# Altium PCB WIoT_WM01_V100.PcbDoc
Units mm, origin at the board's own origin, x right, y up, seen from the top; angles counter-clockwise.
Board outline 36 x 50 mm, 4 copper layers (Top Layer, Internal Plane 1, Internal Plane 2, Bottom Layer); 38 components, 47 nets, 212 pads, 102 vias.
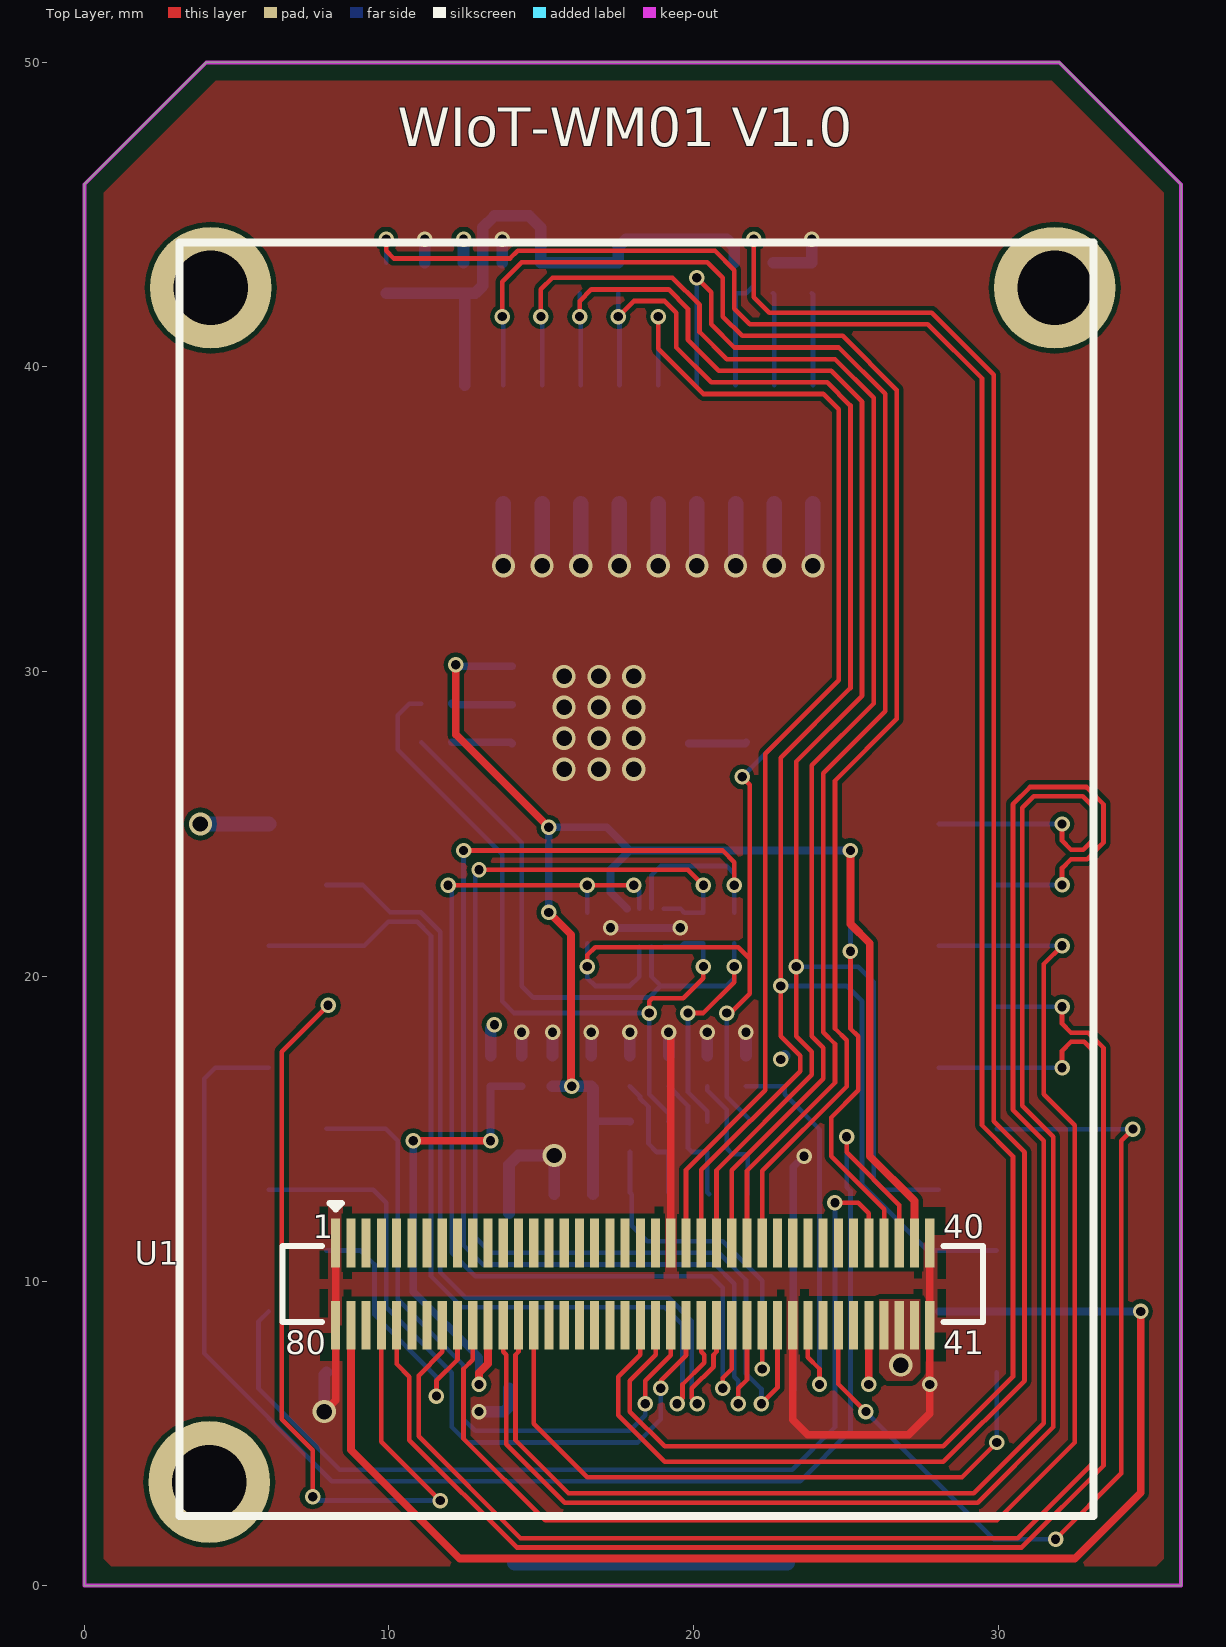
[diagram p0: Top Layer view]
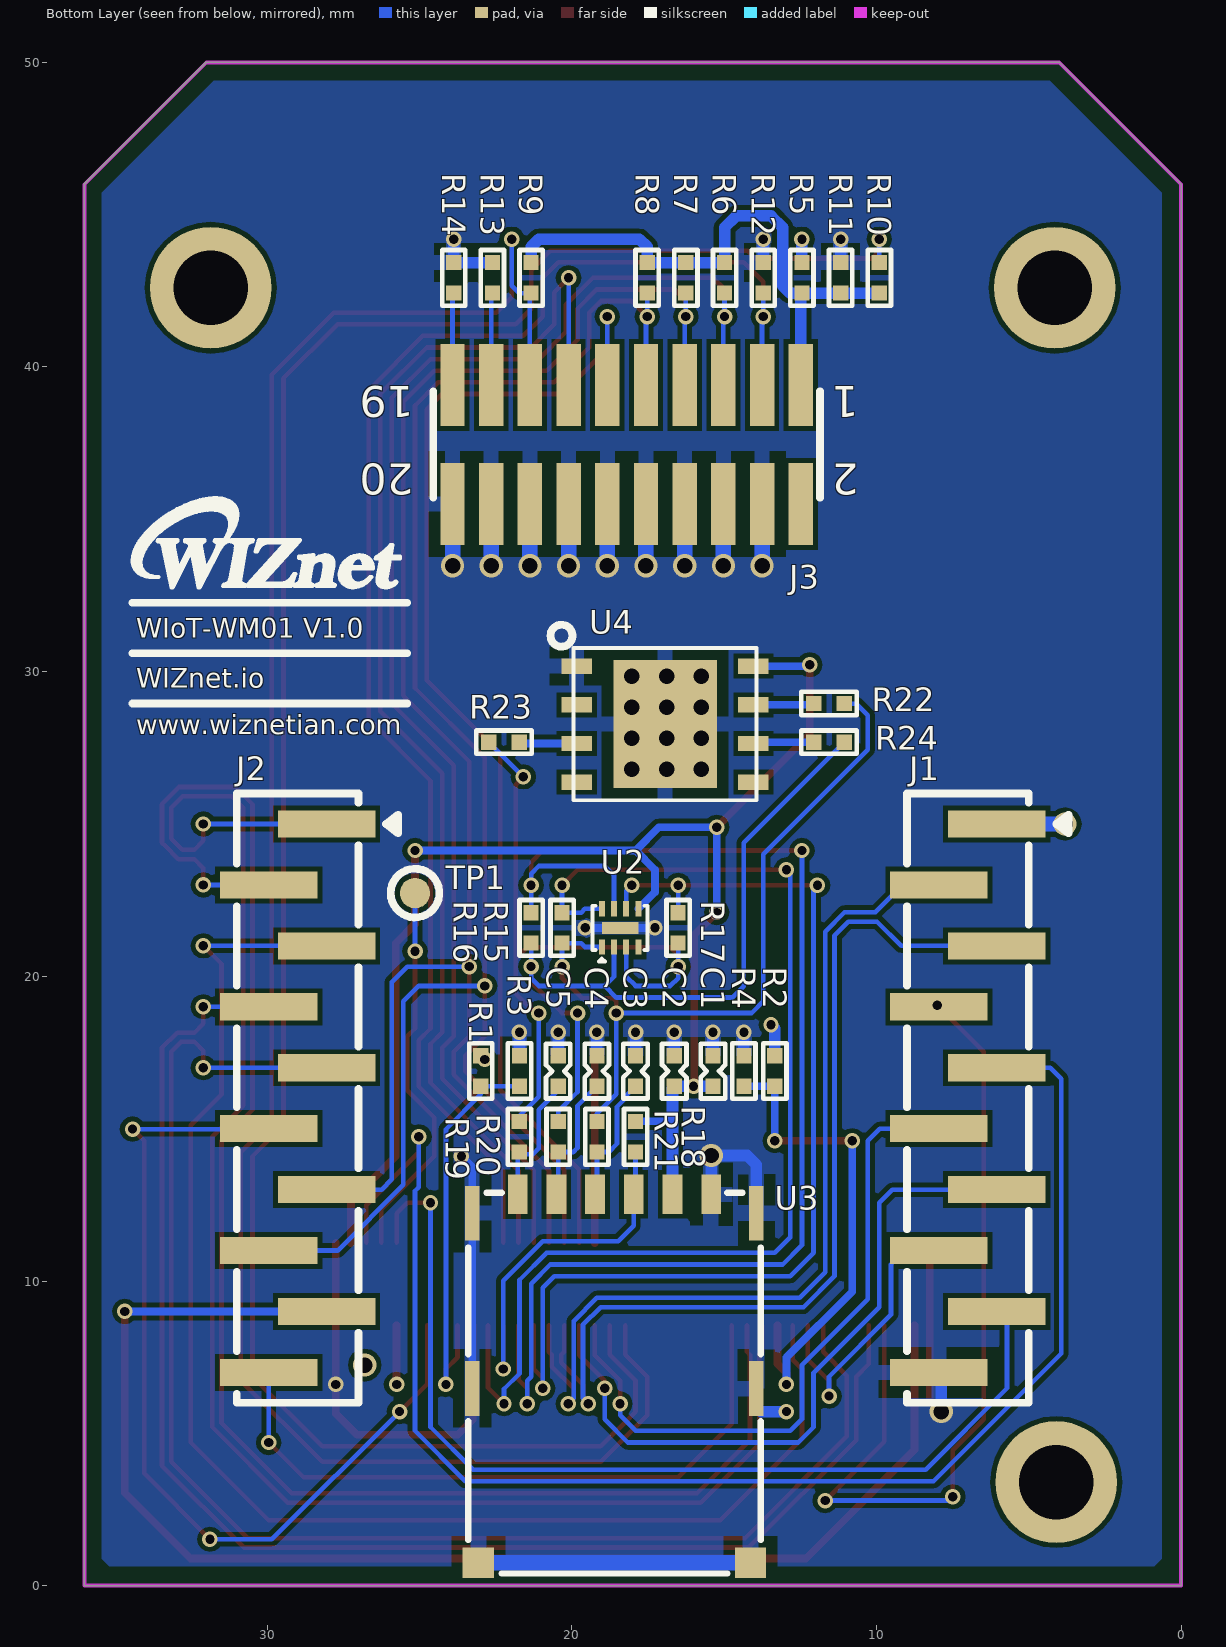
[diagram p1: Bottom Layer view, seen from below]
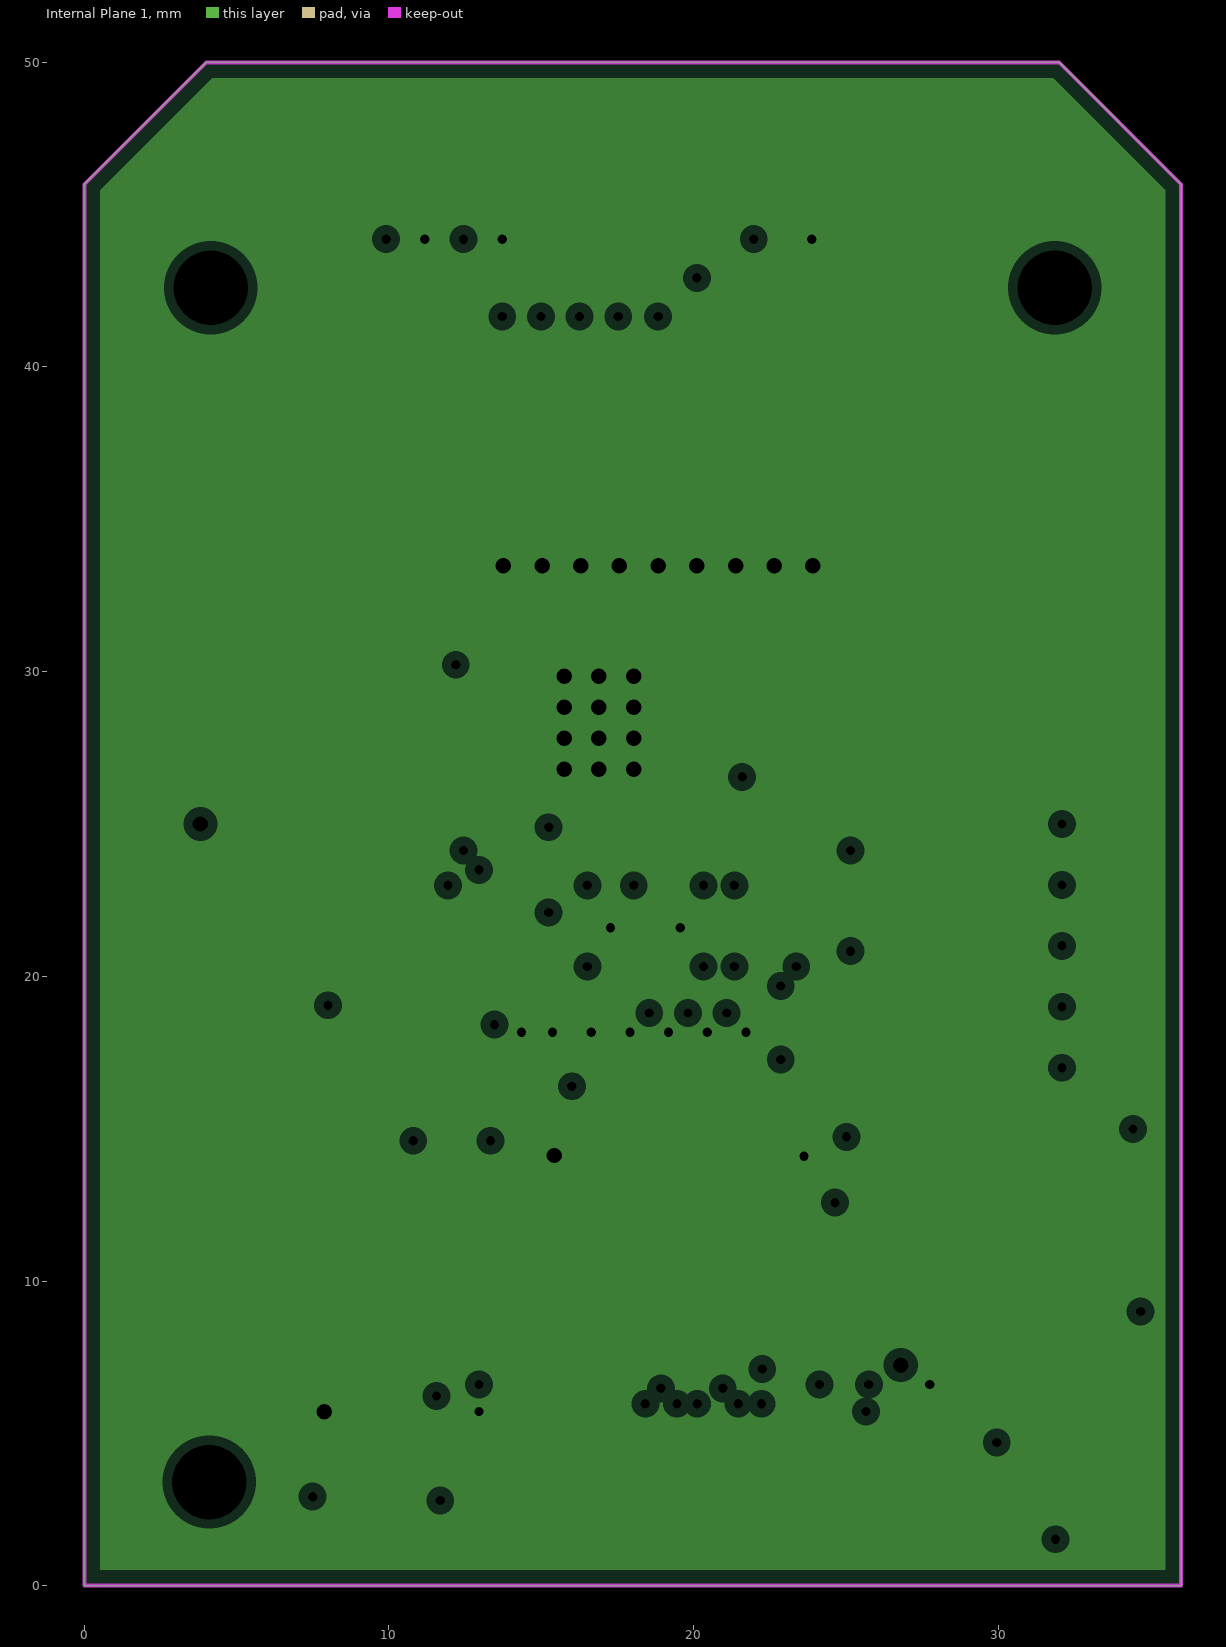
[diagram p2: Internal Plane 1, clearances drawn from the general rule]
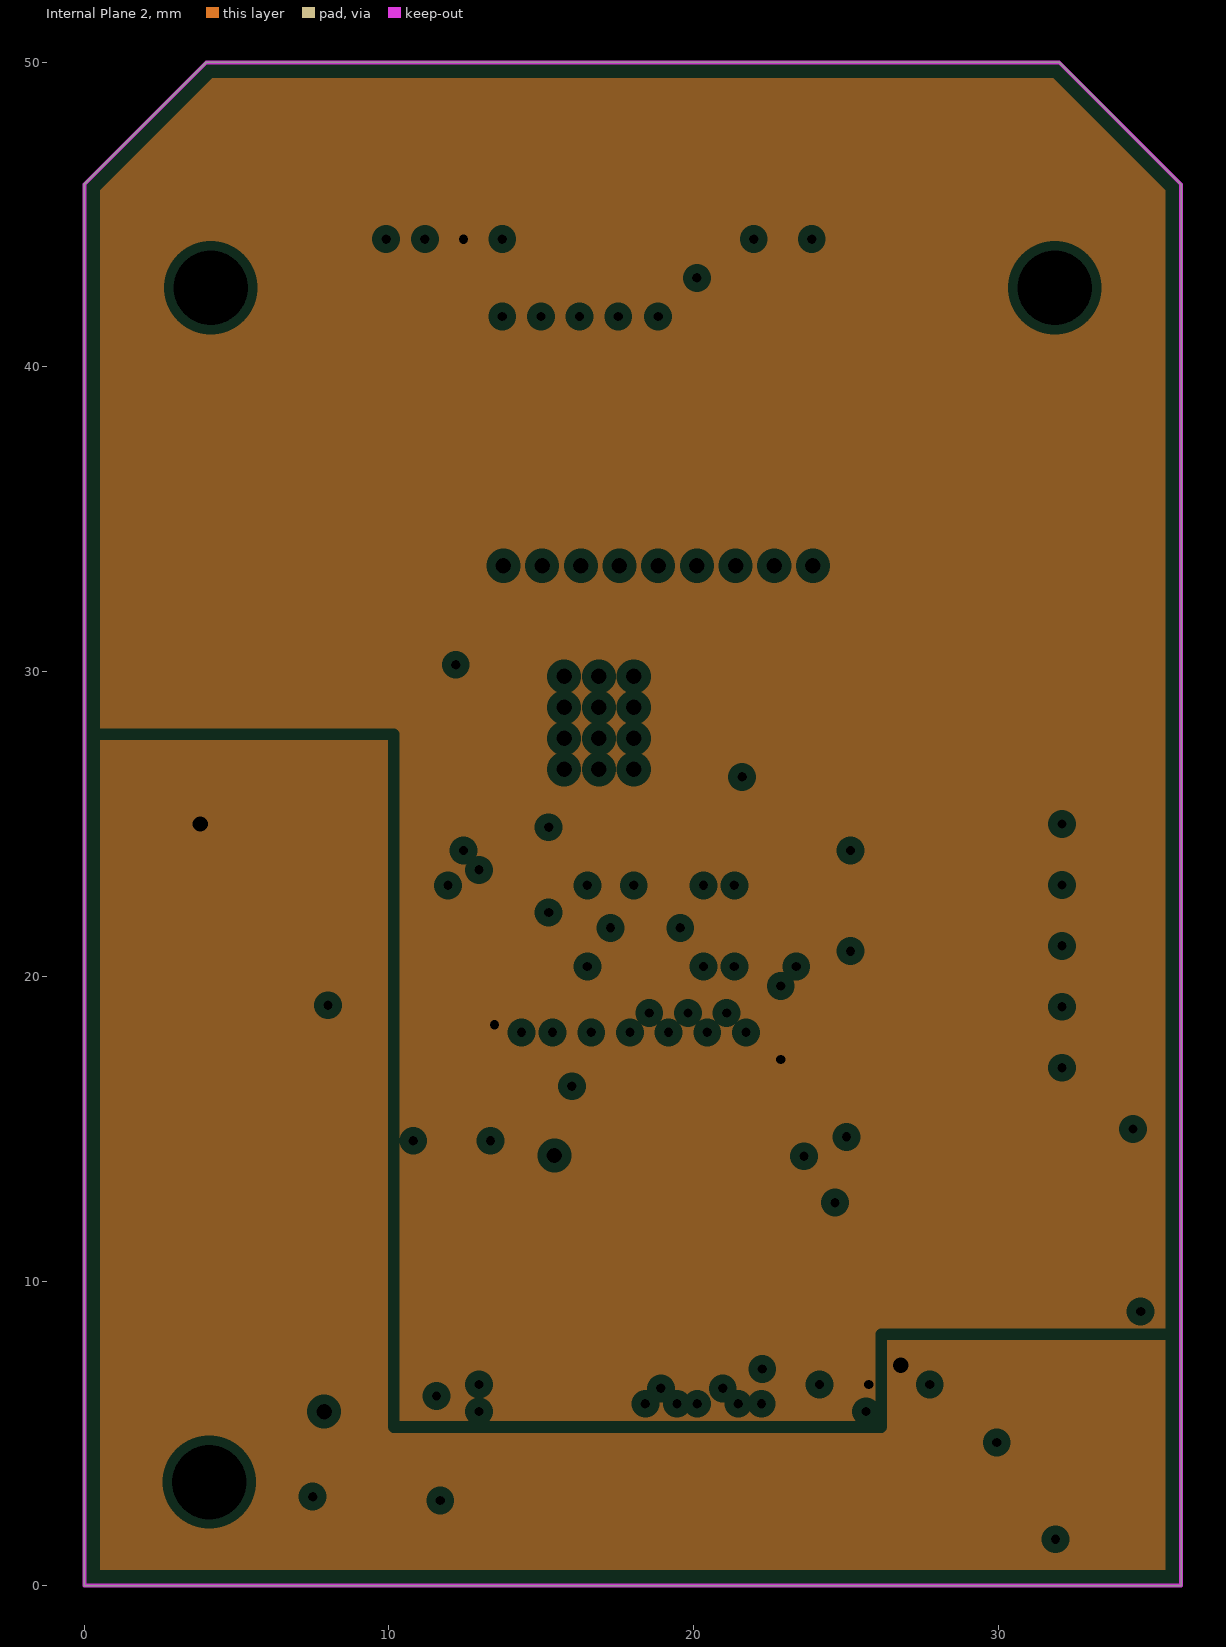
[diagram p3: Internal Plane 2, clearances drawn from the general rule]

## Layer stack, top to bottom
Top Solder: solder mask 0.0102, Solder Resist, Dk 3.5
Top Layer: signal copper 0.0356
Dielectric1: core 0.32, FR-4, Dk 4.8
Internal Plane 1: plane copper 0.0356, net GND
Dielectric5: prepreg 0.32, FR-4, Dk 4.8
Internal Plane 2: plane copper 0.0356, net (Multiple Nets)
Dielectric6: core 0.32, FR-4, Dk 4.8
Bottom Layer: signal copper 0.0356
Bottom Solder: solder mask 0.0102, Solder Resist, Dk 3.5

## Board outline
0,0 0,46 4,50 32,50 36,46 36,0

## Design rules (kind name [scope] priority, off if disabled: settings)
Clearance [All] p1: gap=0.152
DiffPairsRouting [All] p1: maxlimit=0.152 minlimit=0.152 mostfreqgap=0.152 toplayer_minwidth=0.152 toplayer_maxwidth=0.152 toplayer_prefwidth=0.152 bottomlayer_minwidth=0.152 bottomlayer_maxwidth=0.152 bottomlayer_prefwidth=0.152 maxuncoupledlength=15.24
HoleSize [All] p1: absolutevalues=TRUE maxlimit=25.4 minlimit=0.025 maxpercent=80.000 minpercent=20.000
PlaneClearance [All] p1: clearance=0.305
PlaneConnect [All] p1: planeconnectstyle=Direct reliefexpansion=0.508 reliefentries=4 reliefconductorwidth=0.254 reliefairgap=0.254
PolygonConnect PolygonConnect_2 [IsPad vs IsNamedPolygon('Top Layer-GND') Or  IsNamedPolygon('Bottom Layer-GND')] p1: connectstyle=Relief reliefconductorwidth=0.508 reliefentries=4 polygonreliefangle="90 Angle" airgapwidth=0.381
PolygonConnect PolygonConnect_1 [IsVia] p2: connectstyle=Direct reliefconductorwidth=0.254 reliefentries=4 polygonreliefangle="90 Angle" airgapwidth=0.254
PolygonConnect [All] p3: connectstyle=Direct reliefconductorwidth=0.254 reliefentries=4 polygonreliefangle="90 Angle" airgapwidth=0.254
RoutingVias [All] p1: holewidth=0.305 width=0.508 viastyle="Through Hole" minholewidth=0.305 minwidth=0.508 maxholewidth=0.508 maxwidth=0.762
SolderMaskExpansion [All] p1: expansion=0
Width [All] p1: maxlimit=2.54 minlimit=0.102 preferedwidth=0.152
26 further rules are at their usual default settings.

## Components (designator, comment, footprint, x,y, rotation, side; value= is the part's Value field where it differs from the comment)
C1 "1uF" CAP-0402 15.367,16.891 r270 bottom
C2 "33pF" CAP-0402 16.637,16.891 r270 bottom
C3 "33pF" CAP-0402 17.907,16.891 r270 bottom
C4 "33pF" CAP-0402 19.177,16.891 r270 bottom
C5 "33pF" CAP-0402 20.447,16.891 r270 bottom
J1 "2.00mm 1x10 Pin Header SMD" IDC(SMD)-1X10(2MM) 7,16 r180 bottom locked
J2 "2.00mm 1x10 Pin Header SMD" IDC(SMD)-1X10(2MM) 29,16 r180 bottom locked
J3 "1.27mm 2x10 Pin Header SMD" IDC(SMD)-2X10(1.27MM) 18.2,37.456 r0 bottom locked
R1 "DNI" RES-0402#1 22.987,16.891 r90 bottom
R2 "DNI" RES-0402#1 13.335,16.891 r90 bottom
R3 "DNI" RES-0402#1 21.717,16.891 r270 bottom
R4 "DNI" RES-0402#1 14.351,16.891 r270 bottom
R5 "DNI" RES-0402#1 12.446,42.926 r270 bottom
R6 "10K" RES-0402#1 14.986,42.926 r90 bottom
R7 "10K" RES-0402#1 16.256,42.926 r90 bottom
R8 "10K" RES-0402#1 17.526,42.926 r90 bottom
R9 "10K" RES-0402#1 21.336,42.926 r90 bottom
R10 "10K" RES-0402#1 9.906,42.926 r90 bottom
R11 "DNI" RES-0402#1 11.176,42.926 r270 bottom
R12 "47K" RES-0402#1 13.716,42.926 r270 bottom
R13 "10K" RES-0402#1 22.606,42.926 r270 bottom
R14 "10K" RES-0402#1 23.876,42.926 r270 bottom
R15 "DNI" RES-0402#1 20.32,21.59 r270 bottom
R16 "DNI" RES-0402#1 21.336,21.59 r270 bottom
R17 "DNI" RES-0402#1 16.51,21.59 r270 bottom
R18 "DNI" RES-0402#2 17.907,14.732 r270 bottom
R19 "0R" RES-0402#2 21.717,14.732 r270 bottom
R20 "0R" RES-0402#2 20.447,14.732 r90 bottom
R21 "0R" RES-0402#2 19.177,14.732 r90 bottom
R22 "0R" RES-0402#2 11.557,28.956 r180 bottom
R23 "0R" RES-0402#2 22.225,27.686 r180 bottom
R24 "0R" RES-0402#2 11.557,27.686 r180 bottom
TP1 "TESTPOINT_SMD" TP(SMD)-1PI 25.146,22.733 r180 bottom
U1 "AXK6F80347YG" WM-N400MSE 18,9.9 r0 top locked
U2 "TPD3F303DQDR" PWSON08(0.4/1.45X1.8) 18.415,21.59 r90 bottom
U3 "Nano_SIM" 693-043-020-611 18.6,12.895 r180 bottom locked
U4 "e-SIM" e-SIM 19.939,25.781 r180 bottom
? "Comment" LOGO-WIZNET(SMALL) 33.147,32.766 r180 bottom

## Footprints (in the part's own frame and the unit in brackets; to place one, negate y for a bottom-side part, rotate by r counter-clockwise, add the part's x,y. Pads: shape width x height; smd on the part's side, far side on the other; paste and mask are expansions set on the pad)
693-043-020-611 [mm]
  rect 0.65x1.3 smd: 1(1.905,-0.05) 2(-0.635,-0.05) 3(-1.905,-0.05) 5(3.175,-0.05) 6(0.635,-0.05) 7(-3.175,-0.05)
  rect 0.48x1.8 smd: 8(-4.67,-0.67) 9(4.66,-0.67) 10(4.66,-6.42) 11(-4.67,-6.42)
  rect 1.03x1 smd: 12(4.465,-12.14) 13(-4.465,-12.14)
  silkscreen extent -4.8,-12.5 4.8,0, body extent -4.75,-12.5 4.75,0, height 1.2
CAP-0402 [mm]
  rect 0.5x0.5 smd: 1(-0.5,0) 2(0.5,0)
  silkscreen extent -0.9,-0.4 0.9,0.4, body extent -0.48,-0.25 0.52,0.25, height 0.6
e-SIM [mm]
  rect 1x0.5 smd: 1(0.1,4.4) 2(0.1,3.13) 3(0.1,1.86) 4(0.1,0.59) 5(5.9,0.59) 6(5.9,1.86) 7(5.9,3.13) 8(5.9,4.4)
  rect 3.4x4.2 smd paste+0: 9(3,2.5)
  silkscreen extent -0.76,0 6,5.76
IDC(SMD)-1X10(2MM) [mm]
  rect 3.2x0.89 smd: 1(0.95,9) 2(-0.95,7) 3(0.95,5) 4(-0.95,3) 5(0.95,1) 6(-0.95,-1) 7(0.95,-3) 8(-0.95,-5) 9(0.95,-7) 10(-0.95,-9)
  silkscreen extent -2,-10 3.3,10, body extent -2.25,-9.98 2.25,9.97, height 6.5
IDC(SMD)-2X10(1.27MM) [mm]
  rect 0.8x2.7 smd: 1(-5.715,-1.95) 2(-5.715,1.95) 3(-4.445,-1.95) 4(-4.445,1.95) 5(-3.175,-1.95) 6(-3.175,1.95) 7(-1.905,-1.95) 8(-1.905,1.95) 9(-0.635,-1.95) 10(-0.635,1.95) 11(0.635,-1.95) 12(0.635,1.95) 13(1.905,-1.95) 14(1.905,1.95) 15(3.175,-1.95) 16(3.175,1.95) 17(4.445,-1.95) 18(4.445,1.95) 19(5.715,-1.95) 20(5.715,1.95)
  silkscreen extent -6.35,-1.75 6.35,1.75, body extent -6.35,-2.75 6.35,2.75, height 4.5
LOGO-WIZNET(SMALL) [mm]
  silkscreen extent -1.27,0 7.52,2.93
PWSON08(0.4/1.45X1.8) [mm]
  rect 0.5x0.2 smd: 1(-0.625,0.6) 2(-0.625,0.2) 3(-0.625,-0.2) 4(-0.625,-0.6) 5(0.625,-0.6) 6(0.625,-0.2) 7(0.625,0.2) 8(0.625,0.6)
  rect 0.4x1.2 smd: 9(0,0)
  silkscreen extent -1.1,-0.9 0.72,0.9, body extent -0.66,-0.85 0.66,0.85, height 0.8
RES-0402#1 [mm]
  rect 0.5x0.5 smd: 1(-0.5,0) 2(0.5,0)
  silkscreen extent -0.91,-0.38 0.91,0.38, body extent -0.5,-0.25 0.5,0.25, height 0.35
RES-0402#2 [mm]
  rect 0.5x0.5 smd: 1(-0.5,-0.004) 2(0.5,-0.004)
  silkscreen extent -0.91,-0.38 0.91,0.38, body extent -0.5,-0.25 0.5,0.25, height 0.35
TP(SMD)-1PI [mm]
  round 1 smd: 1(0,0)
  silkscreen extent -0.8,-0.8 0.8,0.8
WM-N400MSE [mm]
  round 4 hole 2.45: 0(-13.9,-6.5) 0(-13.85,32.7) 0(13.85,32.7)
  rect 0.3x1.6 smd: 1(-9.75,1.35) 2(-9.25,1.35) 3(-8.75,1.35) 4(-8.25,1.35) 5(-7.75,1.35) 6(-7.25,1.35) 7(-6.75,1.35) 8(-6.25,1.35) 9(-5.75,1.35) 10(-5.25,1.35) 11(-4.75,1.35) 12(-4.25,1.35) 13(-3.75,1.35) 14(-3.25,1.35) 15(-2.75,1.35) 16(-2.25,1.35) 17(-1.75,1.35) 18(-1.25,1.35) 19(-0.75,1.35) 20(-0.25,1.35) 21(0.25,1.35) 22(0.75,1.35) 23(1.25,1.35) 24(1.75,1.35) 25(2.25,1.35) 26(2.75,1.35) 27(3.25,1.35) 28(3.75,1.35) 29(4.25,1.35) 30(4.75,1.35) 31(5.25,1.35) 32(5.75,1.35) 33(6.25,1.35) 34(6.75,1.35) 35(7.25,1.35) 36(7.75,1.35) 37(8.25,1.35) 38(8.75,1.35) 39(9.25,1.35) 40(9.75,1.35) 41(9.75,-1.35) 42(9.25,-1.35) 43(8.75,-1.35) 44(8.25,-1.35) 45(7.75,-1.35) 46(7.25,-1.35) 47(6.75,-1.35) 48(6.25,-1.35) 49(5.75,-1.35) 50(5.25,-1.35) 51(4.75,-1.35) 52(4.25,-1.35) 53(3.75,-1.35) 54(3.25,-1.35) 55(2.75,-1.35) 56(2.25,-1.35) 57(1.75,-1.35) 58(1.25,-1.35) 59(0.75,-1.35) 60(0.25,-1.35) 61(-0.25,-1.35) 62(-0.75,-1.35) 63(-1.25,-1.35) 64(-1.75,-1.35) 65(-2.25,-1.35) 66(-2.75,-1.35) 67(-3.25,-1.35) 68(-3.75,-1.35) 69(-4.25,-1.35) 70(-4.75,-1.35) 71(-5.25,-1.35) 72(-5.75,-1.35) 73(-6.25,-1.35) 74(-6.75,-1.35) 75(-7.25,-1.35) 76(-7.75,-1.35) 77(-8.25,-1.35) 78(-8.75,-1.35) 79(-9.25,-1.35) 80(-9.75,-1.35)
  silkscreen extent -11.5,-1.25 11.5,2.65

## Part data
C1 C2 C3 C4 C5: library part CAP-0402, "Ceramic CAP 0402(1005)"
R1 R2 R3 R4 R5 R6 R7 R8 R9 R10 R11 R12 R13 R14 R15 R16 R17 R18 R19 R20 R21 R22 R23 R24: library part RES-0402, "RES-0402"
TP1: "TEST POINT"
U1: library part WM-N400MSE, "WM-N400MSE"
U2: "ESD Protection SIM"
U3: "Nano SIM SMT 1.2mm Push/Pull"

## Via types
v1: diameter 0.508, hole 0.305, Top Layer to Bottom Layer, tented both sides, 77 vias
v2: diameter 0.762, hole 0.508, Top Layer to Bottom Layer, tented both sides, 25 vias

## Nets (pads, with @x,y where several pads share a name; then routed paths per layer and width w, separated by ;. In a path a pad name is that pad's centre, name@x,y a point inside that pad or via, vN(x,y) a via of type N, cw(c..) or ccw(c..) an arc to the next point about the centre after c; other vN are vias at no path point)
1.8V_OUT: R1.2 R2.2 R5.1 U1.45 | length 4
  Top Layer w0.254: v1(25.75,6.604) U1.45
  Bottom Layer w0.381: R5.1 v1(12.446,44.196) ; R2.2 13.335,18.288 v1(13.462,18.415) ; v1(22.86,17.272) 22.987,17.399 R1.2
EMG_DL_N_GPIO: R2.1 R4.2 U1.70 | length 16.3
  Top Layer w0.254: v1(10.795,14.605) v1(13.335,14.605) ; v1(12.954,6.604) 12.954,6.985 13.25,7.281 U1.70
  Bottom Layer w0.254: v1(10.795,14.605) 10.795,9.652 12.954,7.493 v1(12.954,6.604) ; v1(13.335,14.605) R2.1 R4.2
GND: C1.1 C2.1 C3.1 C4.1 C5.1 J1.10 J3.4 J3.6 J3.8 J3.10 J3.12 J3.14 J3.16 J3.18 J3.20 R3.1 R4.1 R11.1 R12.1 R13.1 R14.1 U1.1 U1.23 U1.40 U1.41 U1.50 U1.80 U2.9 U3.5 U3.8 U3.9 U3.10 U3.11 U3.12 U3.13 U4.1 U4.9 | length 80
  Top Layer w0.254: v2(7.874,5.715) 8.25,6.091 U1.80 U1.1 ; v1(19.177,18.161) 19.25,18.088 U1.23 ; U1.50 23.25,5.452 23.749,4.953 27.051,4.953 27.75,5.652 v1(27.75,6.604) U1.41 U1.40
  Bottom Layer w0.254: v1(17.272,21.59) U2.9 v1(19.558,21.59) ; U3.11 U3.8 23.27,13.745 v1(23.622,14.097)
  Bottom Layer w0.381: v2(7.874,5.715) 7.874,6.924 J1.10 ; R11.1 v1(11.176,44.196) ; v1(12.954,5.715) 13.783,5.715 13.94,5.872 U3.10 ; R12.1 v1(13.716,44.196) ; U3.9 13.94,13.813 14.246,14.119 v2(15.425,14.119) U3.5 ; R4.1 v1(14.351,18.161) ; C1.1 v1(15.367,18.161) ; C2.1 v1(16.637,18.161) ; C3.1 v1(17.907,18.161) ; C4.1 v1(19.177,18.161) ; C5.1 v1(20.447,18.161) ; R3.1 v1(21.717,18.161) ; R13.1 R14.1 v1(23.876,44.196)
  Bottom Layer w0.508: v2(13.755,33.476) J3.4 ; U3.12 U3.13 ; v2(15.025,33.476) J3.6 ; v2(16.295,33.476) J3.8 ; v2(17.565,33.476) J3.10 ; v2(18.835,33.476) J3.12 ; v2(20.105,33.476) J3.14 ; v2(21.375,33.476) J3.16 ; v2(22.645,33.476) J3.18 ; v2(23.915,33.476) J3.20
  other v2: 15.748,26.797 16.891,26.797 18.034,26.797 15.748,27.813 16.891,27.813 18.034,27.813 15.748,28.829 16.891,28.829 18.034,28.829 15.748,29.845 16.891,29.845 18.034,29.845
GPIO_001: J1.8 U1.72 | length 9.5
  Top Layer w0.152: v1(11.557,6.223) 11.557,6.731 12.25,7.424 U1.72
  Bottom Layer w0.152: J1.8 9.066,11 9.525,10.541 9.525,8.89 11.557,6.858 v1(11.557,6.223)
GPIO_002: J2.3 U1.71 | length 47.1
  Top Layer w0.152: U1.71 12.75,7.416 12.446,7.112 12.446,4.826 15.129,2.143 29.956,2.143 32.512,4.699 32.512,15.113 31.496,16.129 31.496,20.404 v1(32.092,21)
  Bottom Layer w0.152: J2.3 v1(32.092,21)
GPIO_003: J1.4 U1.77 | length 28
  Top Layer w0.152: v1(7.493,2.921) 7.493,4.445 6.477,5.461 6.477,17.526 v1(8.001,19.05) ; U1.77 9.75,4.728 v1(11.684,2.794)
  Bottom Layer w0.152: v1(7.493,2.921) 7.62,2.794 v1(11.684,2.794)
GPS_SHUTDOWN: R1.1 R3.2 U1.49 | length 13.6
  Top Layer w0.152: U1.49 23.75,7.492 24.13,7.112 v1(24.13,6.604)
  Bottom Layer w0.152: R3.2 R1.1 22.987,16.129 24.13,14.986 v1(24.13,6.604)
JTAG_PS_HOLD: R10.2 U1.59 | length 73.8
  Top Layer w0.152: v1(9.906,44.196) 9.906,43.815 10.16,43.561 13.97,43.561 14.224,43.815 20.701,43.815 21.336,43.18 21.336,41.91 21.844,41.402 27.686,41.402 29.464,39.624 29.464,15.113 30.48,14.097 30.48,6.858 28.194,4.572 19.05,4.572 17.907,5.715 17.907,6.731 18.75,7.574 U1.59
  Bottom Layer w0.152: R10.2 v1(9.906,44.196)
JTAG_RTCK: J3.11 U1.24 | length 39.5
  Top Layer w0.152: v1(18.835,41.656) 18.835,40.601 20.32,39.116 24.257,39.116 24.765,38.608 24.765,29.718 22.352,27.305 22.352,16.256 19.75,13.654 U1.24
  Bottom Layer w0.152: J3.11 v1(18.835,41.656)
JTAG_SRST: J3.15 R9.1 U1.60 | length 67.9
  Top Layer w0.152: U1.60 18.25,7.582 17.526,6.858 17.526,5.588 19.05,4.064 28.194,4.064 30.861,6.731 30.861,14.224 29.845,15.24 29.845,39.751 27.813,41.783 22.479,41.783 21.971,42.291 v1(21.971,44.196)
  Bottom Layer w0.152: J3.15 21.375,42.387 R9.1 21.725,42.426 21.971,42.672 v1(21.971,44.196)
JTAG_TCK: J2.8 J3.9 R8.1 U1.25 | length 57.2
  Top Layer w0.152: v1(17.526,41.656) 18.034,42.164 19.05,42.164 19.431,41.783 19.431,40.64 20.574,39.497 24.384,39.497 25.146,38.735 25.146,29.464 22.86,27.178 v1(22.86,19.685) 22.86,18.034 23.495,17.399 23.495,16.891 20.25,13.646 U1.25
  Bottom Layer w0.152: R8.1 v1(17.526,41.656) 17.565,41.617 J3.9 ; v1(22.86,19.685) 25.019,19.685 25.527,19.177 25.527,13.155 27.682,11 J2.8
JTAG_TDI: J3.5 R6.1 U1.27 | length 47.1
  Top Layer w0.152: v1(14.986,41.656) 14.986,42.545 15.367,42.926 19.304,42.926 20.193,42.037 20.193,41.148 21.082,40.259 24.638,40.259 25.908,38.989 25.908,28.956 23.876,26.924 23.876,18.034 24.257,17.653 24.257,16.637 21.25,13.63 U1.27
  Bottom Layer w0.152: R6.1 v1(14.986,41.656) 15.025,41.617 J3.5
JTAG_TDO: J3.13 U1.28 | length 42
  Top Layer w0.152: v1(20.105,42.926) 20.574,42.457 20.574,41.402 21.336,40.64 24.765,40.64 26.289,39.116 26.289,28.702 24.257,26.67 24.257,18.161 24.638,17.78 24.638,16.51 21.75,13.622 U1.28
  Bottom Layer w0.152: J3.13 v1(20.105,42.926)
JTAG_TMS: J2.7 J3.7 R7.1 U1.26 | length 56.6
  Top Layer w0.152: v1(16.256,41.656) 16.256,42.164 16.637,42.545 19.177,42.545 19.812,41.91 19.812,40.894 20.828,39.878 24.511,39.878 25.527,38.862 25.527,29.21 23.368,27.051 v1(23.368,20.32) 23.368,18.034 23.876,17.526 23.876,16.764 20.75,13.638 U1.26
  Bottom Layer w0.152: R7.1 v1(16.256,41.656) 16.295,41.617 J3.7 ; v1(23.368,20.32) 25.4,20.32 25.908,19.812 25.908,13.335 26.243,13 J2.7
JTAG_TRST: J3.3 R12.2 U1.29 | length 50
  Top Layer w0.152: v1(13.716,41.656) 13.716,42.799 14.351,43.434 20.447,43.434 20.955,42.926 20.955,41.656 21.59,41.021 24.892,41.021 26.67,39.243 26.67,28.448 24.638,26.416 24.638,18.288 25.019,17.907 25.019,16.383 22.25,13.614 U1.29
  Bottom Layer w0.152: R12.2 v1(13.716,41.656) 13.755,41.617 J3.3
NetC3_2: C3.2 R21.1 U3.2 | length 4.2
  Bottom Layer w0.152: C3.2 18.237,16.061 18.237,16.003 18.517,15.723 18.517,14.503 18.788,14.232 R21.1 U3.2@19.173,12.907
NetC4_2: C4.2 R20.1 U3.3 | length 4.4
  Bottom Layer w0.152: C4.2 19.812,15.756 19.812,14.367 19.947,14.232 R20.1 20.443,12.907 U3.3
NetC5_2: C5.2 R19.2 U3.7 | length 4.4
  Bottom Layer w0.152: C5.2 20.447,16.256 21.082,15.621 21.082,14.351 21.274,14.159 21.775,14.159 U3.7
NetJ3_1: J3.1 R5.2 R6.2 R7.2 R8.2 R9.2 R10.1 R11.2 | length 19.2
  Bottom Layer w0.381: R10.1 R11.2 R5.2 ; J3.1 12.485,42.387 R5.2 ; R9.2 21.336,43.942 21.082,44.196 17.78,44.196 17.526,43.942 R8.2 R7.2 R6.2 14.986,44.577 14.605,44.958 13.462,44.958 13.081,44.577 13.081,42.672 12.835,42.426 R5.2
NetJ3_17: J3.17 R13.2 | length 3
  Bottom Layer w0.152: R13.2 22.645,42.387 J3.17
NetJ3_19: J3.19 R14.2 | length 3
  Bottom Layer w0.152: R14.2 23.915,42.387 J3.19
NetR15_1: R15.1 U1.51 U2.8 | length 38.5
  Top Layer w0.152: v1(12.954,23.495) 19.812,23.495 v1(20.32,22.987) ; v1(22.225,5.969) 22.75,6.494 U1.51
  Bottom Layer w0.152: v1(12.954,23.495) 12.827,23.368 12.827,11.43 13.335,10.922 20.828,10.922 21.717,10.033 21.717,6.963 22.225,6.455 v1(22.225,5.969) ; U2.8 19.568,22.215 19.693,22.09 R15.1 v1(20.32,22.987)
NetR16_1: R16.1 U1.53 U2.7 | length 44.2
  Top Layer w0.152: v1(12.446,24.13) 20.955,24.13 21.336,23.749 v1(21.336,22.987) ; v1(21.463,5.969) 21.463,6.477 21.75,6.764 U1.53
  Bottom Layer w0.152: v1(12.446,24.13) 12.446,11.176 13.081,10.541 20.701,10.541 21.336,9.906 21.336,6.858 21.463,6.731 v1(21.463,5.969) ; U2.7 18.615,23.314 18.923,23.622 21.082,23.622 21.336,23.368 v1(21.336,22.987) R16.1
NetR17_1: R17.1 U1.54 U2.6 | length 34.8
  Top Layer w0.152: v1(11.938,22.987) v1(16.51,22.987) v1(18.034,22.987) ; v1(20.955,6.477) 20.955,6.817 21.25,7.112 U1.54
  Bottom Layer w0.152: v1(11.938,22.987) 12.065,22.86 12.065,10.922 12.827,10.16 20.574,10.16 20.955,9.779 v1(20.955,6.477) ; R17.1 v1(16.51,22.987) ; v1(18.034,22.987) 18.215,22.806 U2.6
NetR18_2: R18.2 U1.52 U3.6 | length 11.8
  Top Layer w0.152: v1(22.25,7.112) U1.52
  Bottom Layer w0.152: R18.2 17.911,12.899 U3.6 17.965,11.811 18.473,11.303 20.955,11.303 22.25,10.008 v1(22.25,7.112)
NetR22_1: R22.1 U4.7 | length 2
  Bottom Layer w0.254: R22.1 12.098,28.911 U4.7
NetR23_2: R23.2 U4.3 | length 1.9
  Bottom Layer w0.254: U4.3 21.684,27.641 R23.2
NetR24_1: R24.1 U4.6 | length 2
  Bottom Layer w0.254: R24.1 13.998,27.682 U4.6
POWER: J1.9 U1.36 | length 32.9
  Top Layer w0.152: v1(24.638,12.573) 25.4,12.573 25.75,12.223 U1.36
  Bottom Layer w0.152: J1.9 5.715,8.665 5.715,6.477 8.382,3.81 23.241,3.81 24.638,5.207 v1(24.638,12.573)
POWER_LED: J2.6 U1.47 | length 30.2
  Top Layer w0.152: U1.47 24.75,6.619 v1(25.654,5.715) ; v1(31.877,1.524) 34.036,3.683 34.036,14.605 v1(34.417,14.986)
  Bottom Layer w0.152: v1(25.654,5.715) 29.845,1.524 v1(31.877,1.524) ; J2.6 29.964,14.986 v1(34.417,14.986)
RESET: J1.5 U1.38 | length 48.8
  Top Layer w0.152: v1(25.019,14.732) 25.019,14.224 26.75,12.493 U1.38
  Bottom Layer w0.152: J1.5 4.3,17 3.937,16.637 3.937,7.62 8.128,3.429 23.495,3.429 25.146,5.08 25.146,12.954 25.019,13.081 v1(25.019,14.732)
SIMCLK: R16.2 R20.2 R24.2 U2.2 | length 25.6
  Top Layer w0.152: v1(19.812,18.796) 20.32,18.796 21.336,19.812 v1(21.336,20.32)
  Bottom Layer w0.152: R24.2 14.355,24.384 14.355,19.681 14.732,19.304 18.542,19.304 18.923,19.685 ; U2.2 18.615,19.993 18.923,19.685 ; v1(19.812,18.796) 19.812,16.203 20.443,15.572 R20.2 ; R16.2 v1(21.336,20.32) 21.336,19.939 21.082,19.685 18.923,19.685
SIMIO: R17.2 R19.1 R23.1 U2.3 | length 23.8
  Top Layer w0.152: v1(16.51,20.32) 16.51,20.701 16.764,20.955 21.463,20.955 21.819,20.599 ; v1@21.082,18.669 21.844,19.431 21.844,26.293 v1(21.59,26.547)
  Bottom Layer w0.152: R17.2 v1(16.51,20.32) 16.51,19.939 16.764,19.685 17.907,19.685 18.215,19.993 U2.3 ; v1(21.082,18.796) 21.082,16.052 21.848,15.286 R19.1@21.848,15.232 ; v1(21.59,26.547) R23.1
SIMRST: R15.2 R21.2 R22.2 U2.1 | length 25.5
  Top Layer w0.152: v1(18.542,18.796) 18.542,19.177 18.644,19.279 19.66,19.279 20.32,19.939 v1(20.32,20.32)
  Bottom Layer w0.152: R22.2 10.664,28.952 10.287,28.575 10.287,27.432 13.716,24.003 13.716,19.177 14.097,18.796 v1(18.542,18.796) 18.542,16.129 19.177,15.494 19.177,15.236 R21.2 ; U2.1 19.568,20.965 19.693,21.09 R15.2 v1(20.32,20.32)
UART1_CTS: J1.6 U1.58 | length 22.2
  Top Layer w0.152: v1(18.415,5.969) 18.415,6.731 19.25,7.566 U1.58
  Bottom Layer w0.152: J1.6 9.892,15 10.287,14.605 10.287,9.398 12.446,7.239 12.446,5.461 12.827,5.08 17.907,5.08 18.415,5.588 v1(18.415,5.969)
UART1_RTS: J1.7 U1.57 | length 23.1
  Top Layer w0.152: v1(18.923,6.477) 18.923,6.731 19.75,7.558 U1.57
  Bottom Layer w0.152: J1.7 9.479,13 9.906,12.573 9.906,9.144 12.065,6.985 12.065,5.207 12.573,4.699 18.161,4.699 18.923,5.461 v1(18.923,6.477)
UART1_RXD: J1.3 U1.56 | length 31.6
  Top Layer w0.152: v1(19.456,5.969) 19.634,6.147 19.634,6.603 20.348,7.317 20.348,7.576 20.25,7.674 U1.56
  Bottom Layer w0.152: J1.3 9.189,21 9.982,21.793 10.923,21.793 11.379,21.337 11.379,10.161 12.396,9.144 19.05,9.144 19.634,8.56 19.634,6.147 v1(19.456,5.969)
UART1_TXD: J1.2 U1.55 | length 30.2
  Top Layer w0.152: v1(20.117,5.969) 19.939,6.147 19.939,6.477 20.652,7.19 20.652,7.576 20.75,7.674 U1.55
  Bottom Layer w0.152: J1.2 9.131,23 10.033,22.098 11.049,22.098 11.684,21.463 11.684,10.287 12.522,9.449 19.176,9.449 19.939,8.686 19.939,6.147 v1(20.117,5.969)
UART2_RXD: J2.5 U1.73 | length 47.9
  Top Layer w0.152: U1.73 11.75,7.674 10.973,6.897 10.973,4.902 14.316,1.559 30.642,1.559 33.147,4.064 33.147,17.526 32.825,17.848 32.385,17.848 32.092,17.555 v1(32.092,17)
  Bottom Layer w0.152: J2.5 v1(32.092,17)
UART2_TXD: J2.4 U1.76 | length 47.4
  Top Layer w0.152: U1.76 10.25,7.276 10.668,6.858 10.668,4.776 14.19,1.254 30.768,1.254 33.452,3.938 33.452,17.652 32.952,18.152 32.385,18.152 32.092,18.445 v1(32.092,19)
  Bottom Layer w0.152: J2.4 v1(32.092,19)
USB_D+: J2.1 U1.69 | length 54.1
  Top Layer w0.152: U1.69 13.75,7.674 13.848,7.576 13.848,4.644 15.765,2.727 29.32,2.727 31.801,5.208 31.801,14.731 30.785,15.747 30.785,25.528 31.165,25.908 32.766,25.908 33.147,25.527 33.147,24.511 32.788,24.152 32.385,24.152 32.092,24.445 v1(32.092,25)
  Bottom Layer w0.152: J2.1 v1(32.092,25)
USB_D-: J2.2 U1.68 | length 52.7
  Top Layer w0.152: U1.68 14.25,7.674 14.152,7.576 14.152,4.771 15.891,3.032 29.194,3.032 31.496,5.334 31.496,14.605 30.48,15.621 30.48,25.654 31.039,26.213 32.892,26.213 32.982,26.124 33.452,25.653 33.452,24.385 33.363,24.295 32.915,23.848 32.385,23.848 32.092,23.555 v1(32.092,23)
  Bottom Layer w0.152: J2.2 v1(32.092,23)
USB_ID: J2.10 U1.67 | length 21.9
  Top Layer w0.152: U1.67 14.75,5.316 16.51,3.556 28.807,3.556 v1(29.95,4.699)
  Bottom Layer w0.152: v1(29.95,4.699) J2.10
USB_VBUS: J2.9 U1.79 | length 45
  Top Layer w0.254: U1.79 8.75,4.458 12.319,0.889 32.512,0.889 34.671,3.048 v1(34.671,9)
  Bottom Layer w0.254: J2.9 v1(34.671,9)
USIM_PWR: C1.2 C2.2 R18.1 U1.39 U2.5 U3.1 U4.8 | length 49.7
  Top Layer w0.254: v1(12.192,30.226) 12.192,27.94 v1(15.24,24.892) ; v1(15.24,22.098) 15.977,21.361 15.977,16.416 v1(16.002,16.391) ; v1(25.146,24.13) 25.146,21.717 25.781,21.082 25.781,14.097 27.25,12.628 U1.39
  Bottom Layer w0.254: v1@12.237,30.181 U4.8 ; v1(15.24,22.098) v1(15.24,24.892) 17.145,24.892 17.907,24.13 ; 16.695,15.24 17.903,15.24 R18.1 ; U2.5 17.272,22.758 17.272,23.495 17.907,24.13 ; v1(25.146,24.13) 17.907,24.13
  Bottom Layer w0.381: v1(12.192,30.226) v1@12.237,30.181 ; C1.2 v1(16.002,16.391) C2.2 16.695,16.333 16.695,15.24 U3.1
VCOIN: TP1.1 U1.37 | length 12.7
  Top Layer w0.152: v1(25.146,20.828) 25.146,18.288 25.4,18.034 25.4,16.256 24.511,15.367 24.511,14.097 26.25,12.358 U1.37
  Bottom Layer w0.152: v1(25.146,20.828) TP1.1
XBEE_VIN: J1.1 U1.42 U1.43 U1.44 | length 2.2
  Bottom Layer w0.508: v2(3.81,25) J1.1
  other v2: 26.797,7.239
pads on no net: J3.2 U1.0 U1.2 U1.3 U1.4 U1.5 U1.6 U1.7 U1.8 U1.9 U1.10 U1.11 U1.12 U1.13 U1.14 U1.15 U1.16 U1.17 U1.18 U1.19 U1.20 U1.21 U1.22 U1.30 U1.31 U1.32 U1.33 U1.34 U1.35 U1.46 U1.48 U1.61 U1.62 U1.63 U1.64 U1.65 U1.66 U1.74 U1.75 U1.78 U2.4 U4.2 U4.4 U4.5

## Polygon pours and split planes (outlines as drawn)
GND on Top Layer "Top Layer-GND" (solid, remove dead copper, pour order 12): 0.635,6.731 0.635,0.889 0.889,0.635 1.27,0.635 35.179,0.635 35.433,0.889 35.433,1.016 35.433,45.72 32.004,49.149 31.75,49.403 28.956,49.403 4.318,49.403 2.413,47.498 0.635,45.72 0.635,40.64
XBEE_VIN on Top Layer "Top Layer-net" (solid, remove dead copper, pour order 10): 26.086,6.985 26.34,6.731 27.178,6.731 27.432,6.985 27.432,7.874 27.432,9.398 26.086,9.398
GND on Bottom Layer "Top Layer-GND" (solid, remove dead copper, pour order 14): 0.635,6.731 0.635,0.889 0.889,0.635 1.27,0.635 35.179,0.635 35.433,0.889 35.433,1.016 35.433,45.72 32.004,49.149 31.75,49.403 28.956,49.403 4.318,49.403 2.413,47.498 0.635,45.72 0.635,40.64
GND on Internal Plane 1 (split plane): 35.49,45.789 35.49,0.51 0.51,0.51 0.51,45.789 4.211,49.49 31.789,49.49
XBEE_VIN on Internal Plane 2 (split plane): 9.968,5.207 9.974,5.157 9.994,5.111 10.024,5.071 10.064,5.041 10.11,5.021 10.16,5.015 26.162,5.015 26.212,5.021 26.258,5.041 26.298,5.071 26.328,5.111 26.348,5.157 26.354,5.207 26.354,8.063 35.49,8.063 35.49,0.51 0.51,0.51 0.51,27.748 9.968,27.748
1.8V_OUT on Internal Plane 2 (split plane): 35.49,45.789 35.49,8.447 26.162,8.447 26.112,8.441 26.066,8.421 26.026,8.391 25.996,8.351 25.976,8.305 25.97,8.255 25.97,5.399 10.352,5.399 10.352,27.94 10.346,27.99 10.326,28.036 10.296,28.076 10.256,28.106 10.21,28.126 10.16,28.132 0.51,28.132 0.51,45.789 4.211,49.49 31.789,49.49

## Keep-outs
Keep-Out Layer:
  the board outline again, w0.127
  text ".Layer_Name" at 9.398,56.515 h1.52

## Other copper
Top Layer:
  text ".Layer_Name" at 9.398,56.515 h1.52
Bottom Layer:
  text ".Layer_Name" at 9.398,56.515 h1.52
Internal Plane 1 (plane layer: these items are gaps in the copper):
  text "GND" at 9.398,56.547 h1.52
Internal Plane 2 (plane layer: these items are gaps in the copper):
  lines w0.381: 0,27.94 10.16,27.94 10.16,5.207 26.162,5.207 26.162,8.255 36,8.255
  text "POWER" at 9.398,56.547 h1.52
  text "1.8V_OUT" at 0.762,28.575 h0.76
  text "XBEE_VIN" at 0.762,26.797 h0.76

## Silkscreen, mask and mechanical layers (free items; w line width, h text height)
Top Overlay:
  lines w0.254: 3.127,2.286 3.127,44.086 33.127,44.086 33.127,2.286 3.127,2.286
  text ".Layer_Name" at 9.398,56.547 h1.52
  text "WIoT-WM01 V1.0" at 10.287,47.244 h1.27
Bottom Overlay:
  lines w0.25: 25.4,28.956 34.417,28.956 ; 25.4,30.607 34.417,30.607 ; 25.4,32.258 34.417,32.258
  text ".Layer_Name" at 9.398,56.515 h1.52
  text "WIoT-WM01 V1.0" at 34.29,31.115 h0.64
  text "WIZnet.io" at 34.29,29.464 h0.64
  text "www.wiznetian.com" at 34.29,27.94 h0.64
Top Paste:
  text ".Layer_Name" at 9.398,56.515 h1.52
Bottom Paste:
  text ".Layer_Name" at 9.398,56.515 h1.52
Top Solder:
  text ".Layer_Name" at 9.398,56.515 h1.52
Bottom Solder:
  text ".Layer_Name" at 9.398,56.515 h1.52
Drill Guide:
  text ".Layer_Name" at 9.398,56.515 h1.52
Mechanical 2:
  lines w0.127: 41.986,16.129 68.148,16.129 ; 41.986,18.923 68.148,18.923 ; 0,0 36,0 36,46 32,50 4,50 0,46 0,0 ; 40.64,4.775 ccw(c41.351,4.775) 41.351,4.064 68.529,4.064 ccw(c68.529,4.775) 69.24,4.775 69.24,24.003 ccw(c68.529,24.003) 68.529,24.714 41.351,24.714 ccw(c41.351,24.003) 40.64,24.003 40.64,4.775
  text "BOARD NAME : WM-N400MSE_INTERFACE" at 0,67.691 h1.52
  text "VERSION : V100" at 0,64.897 h1.52
  text "SIZE : 36mX50mX1.6T" at 0,62.103 h1.52
  text "GERBER DATE : 2019.02.18" at 0,59.309 h1.52
  text "LAYER :" at 0,56.515 h1.52
  text "Layer Stack Up Detail for:" at 42.113,22.606 h1.02
  text "WM-N400MSE_INTERFACE.PcbDoc" at 41.986,20.193 h0.89
  text "Layer Name : 4L  1.6T" at 42.113,17.018 h1.02
  text "Top Layer" at 41.986,13.335 h1.52
  text "GND" at 41.986,10.541 h1.52
  text "POWER" at 41.986,7.874 h1.52
  text "Bottom Layer" at 41.986,5.334 h1.52
  text "KS Technology artwork" at 40.64,0 h5.08
Drill Drawing:
  text ".Layer_Name" at 9.398,56.515 h1.52
  text ".Legend" at 42.672,27.432 h1.02

## Dimensions
0,0 to 4,50 on Mechanical 2
0,0 to 36,0 on Mechanical 2

## Text inside footprints (layer, text, board x,y; h text height)
J3: Bottom Overlay "19" at 25.185,39.361 h1.02 r180; Bottom Overlay "20" at 25.185,36.821 h1.02 r180; Bottom Overlay "2" at 10.58,36.821 h1.02 r180; Bottom Overlay "1" at 10.58,39.361 h1.02 r180
U1: Top Overlay "41" at 28.2,7.6 h0.76; Top Overlay "40" at 28.2,11.4 h0.76; Top Overlay "80" at 6.6,7.6 h0.76; Top Overlay "1" at 7.5,11.4 h0.76